# Altium PCB mach_mo_rong_v2.PcbDoc (part 2 of 3)
Units mm, origin at the board's own origin, x right, y up, seen from the top; angles counter-clockwise.
Board outline 108.98 x 90.43 mm, 2 copper layers (Top Layer, Bottom Layer); 128 components, 101 nets, 811 pads, 96 vias.
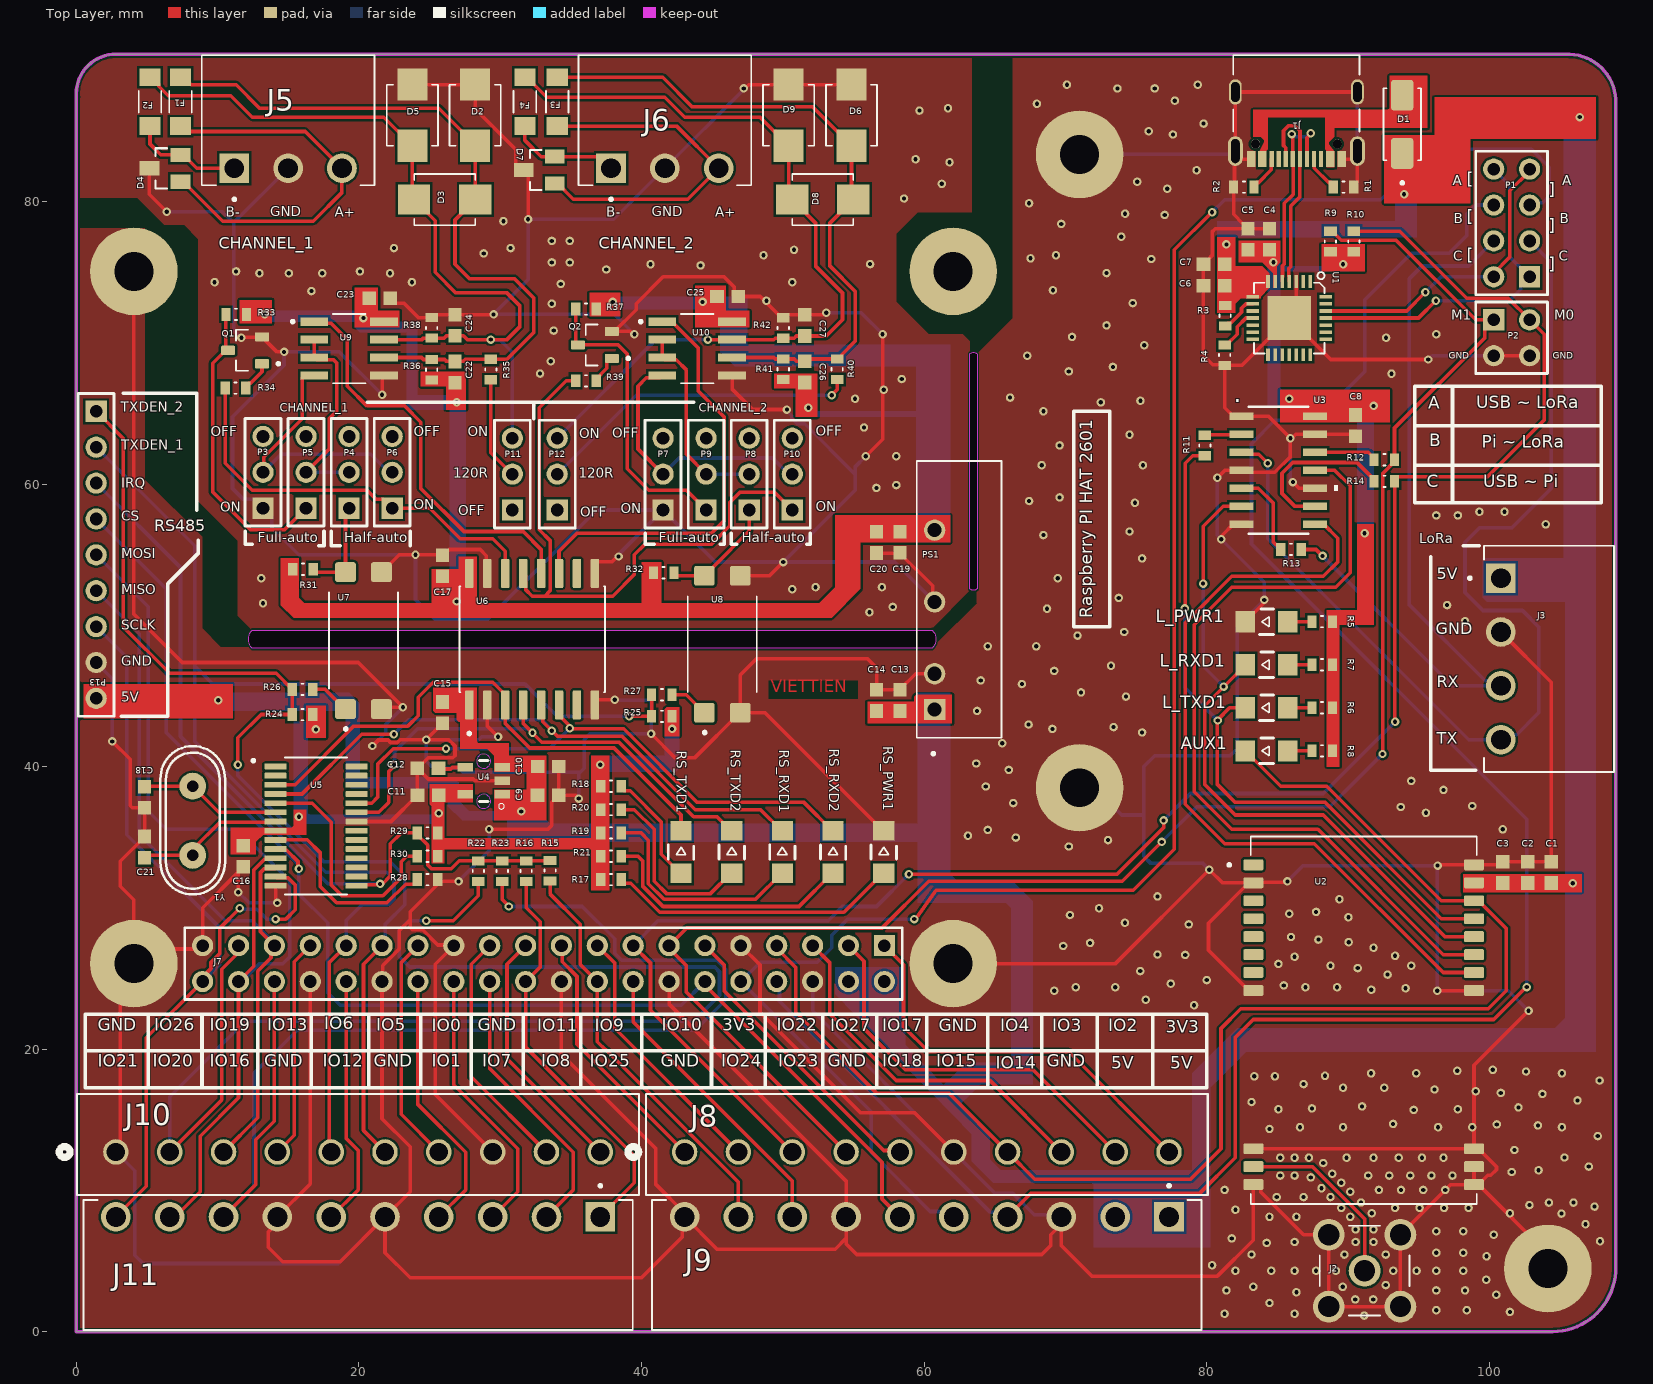
[diagram p0: Top Layer view]

## Via types
v1: diameter 0.6, hole 0.3, Top Layer to Bottom Layer, tented both sides, 95 vias
v2: diameter 0.6, hole 0.3, Top Layer to Bottom Layer, 1 vias

## Nets (pads, with @x,y where several pads share a name; then routed paths per layer and width w, separated by ;. In a path a pad name is that pad's centre, name@x,y a point inside that pad or via, vN(x,y) a via of type N, cw(c..) or ccw(c..) an arc to the next point about the centre after c; other vN are vias at no path point) (continued)
M1: (continued)
  Top Layer w0.254: U3.11@87.694,60.982 89.061,60.982 90.17,59.873 90.17,53.721 89.154,52.705 81.788,52.705 79.121,50.038 79.121,38.227 81.788,35.56 87.884,35.56 96.75,26.694 U2.21@98.933,26.694
M_0: J7.15 J8.3 P2.2 R10.2 R14.2 | length 132.1
  Top Layer w0.254: J7.15@39.414,27.327 40.64,26.101 40.64,22.755 J8.3@50.673,12.722 ; v1(58.928,32.385) 73.66,32.385 76.962,35.687 v1(76.962,36.195) ; R10.2@90.424,77.904 93.673,77.904 98.425,73.152 101.346,73.152 P2.2@102.87,71.628 103.901,70.597 103.901,64.531 99.891,60.521 93.506,60.521 93.308,60.323 R14.2@93.308,60.198 93.326,60.18 93.326,43.199 v1(93.345,43.18)
  Bottom Layer w0.254: J7.15@39.414,27.327 41.17,29.083 53.213,29.083 54.229,30.099 56.642,30.099 v1(58.928,32.385) ; v1(76.962,36.195) 78.867,38.1 88.265,38.1 v1(93.345,43.18)